# Altium PCB H_bridge_2_layers.PcbDoc
Units mil, origin at the board's own origin, x right, y up, seen from the top; angles counter-clockwise.
Board outline 2913.39 x 2362.2 mil, 2 copper layers (Top Layer, Bottom Layer); 43 components, 19 nets, 107 pads, 13 vias.
Unrouted connection lines stored in the file: 1.
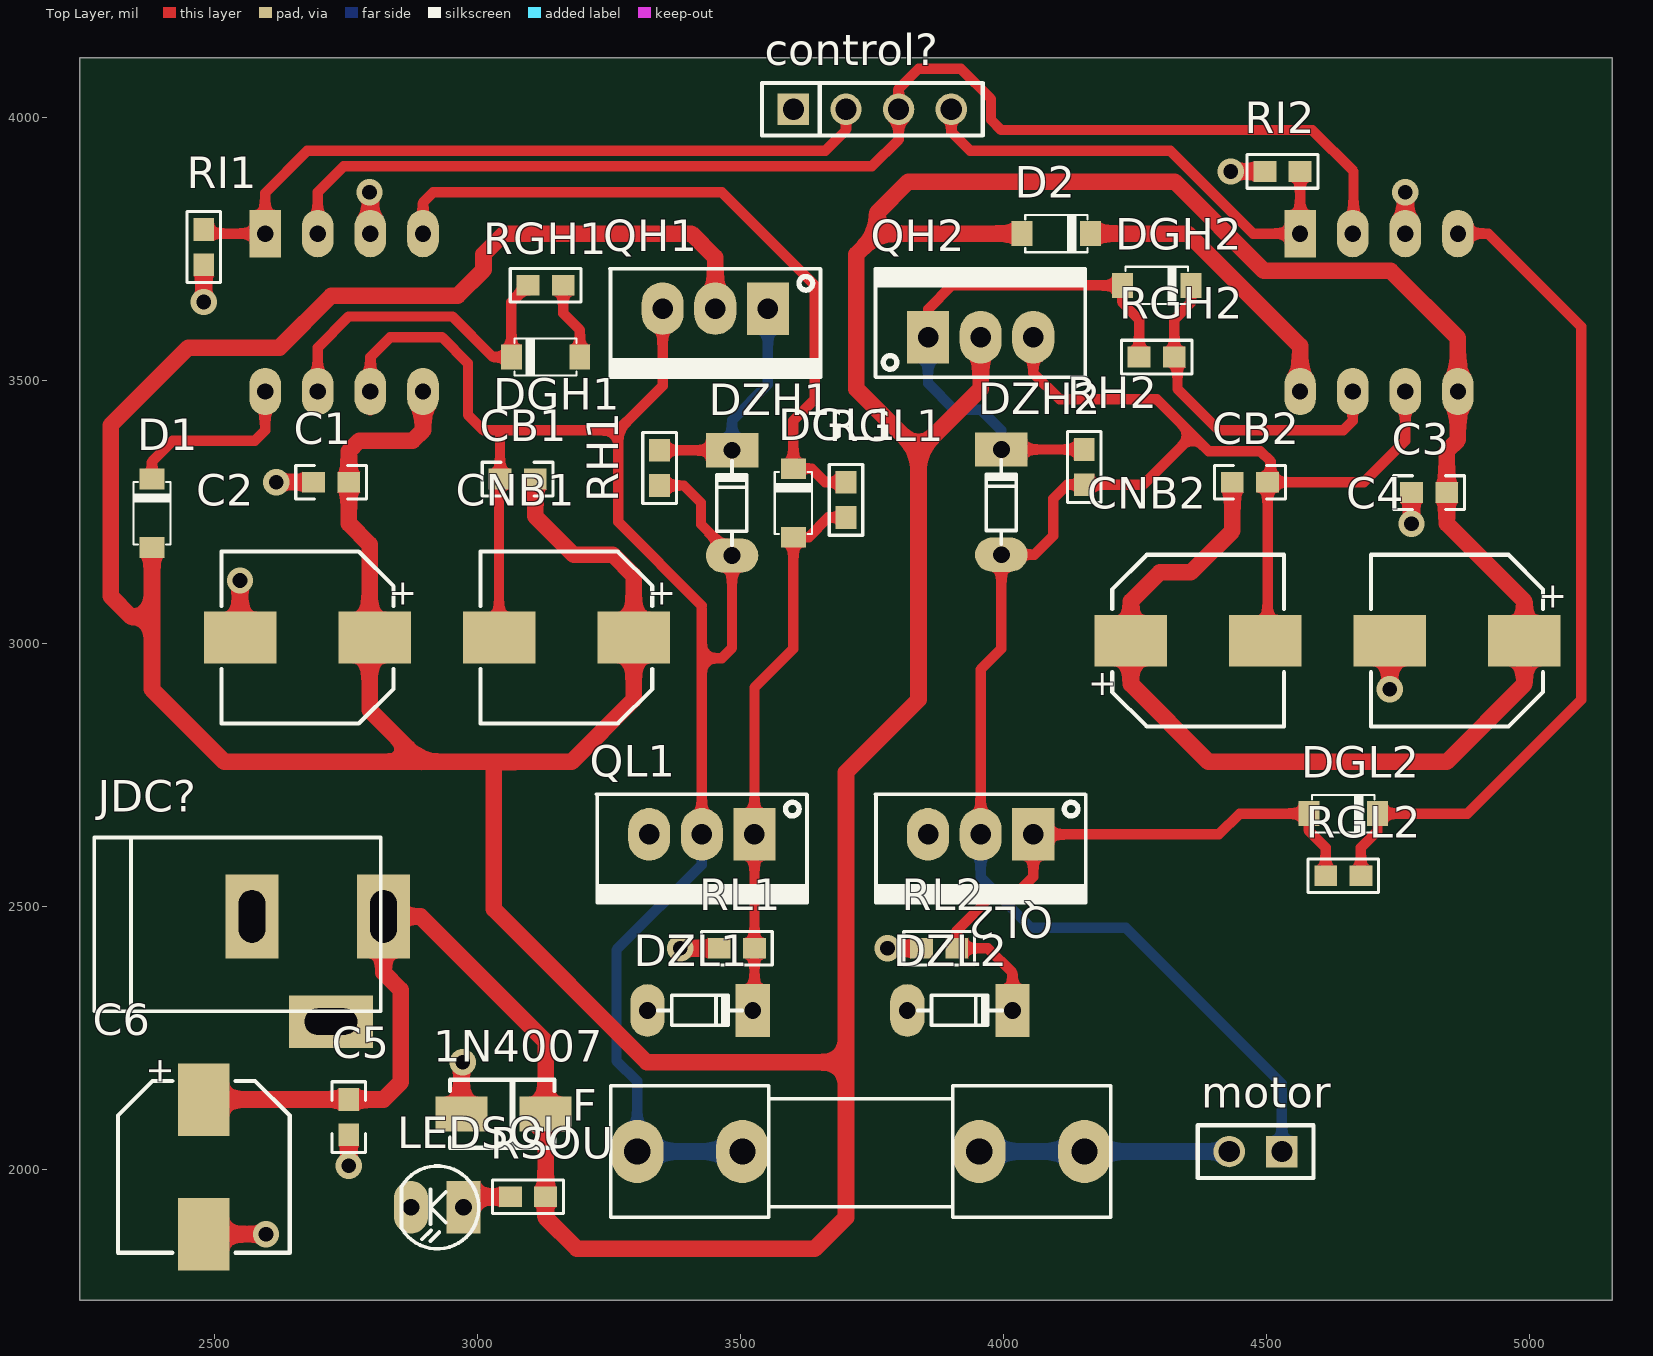
[diagram p0: Top Layer view]
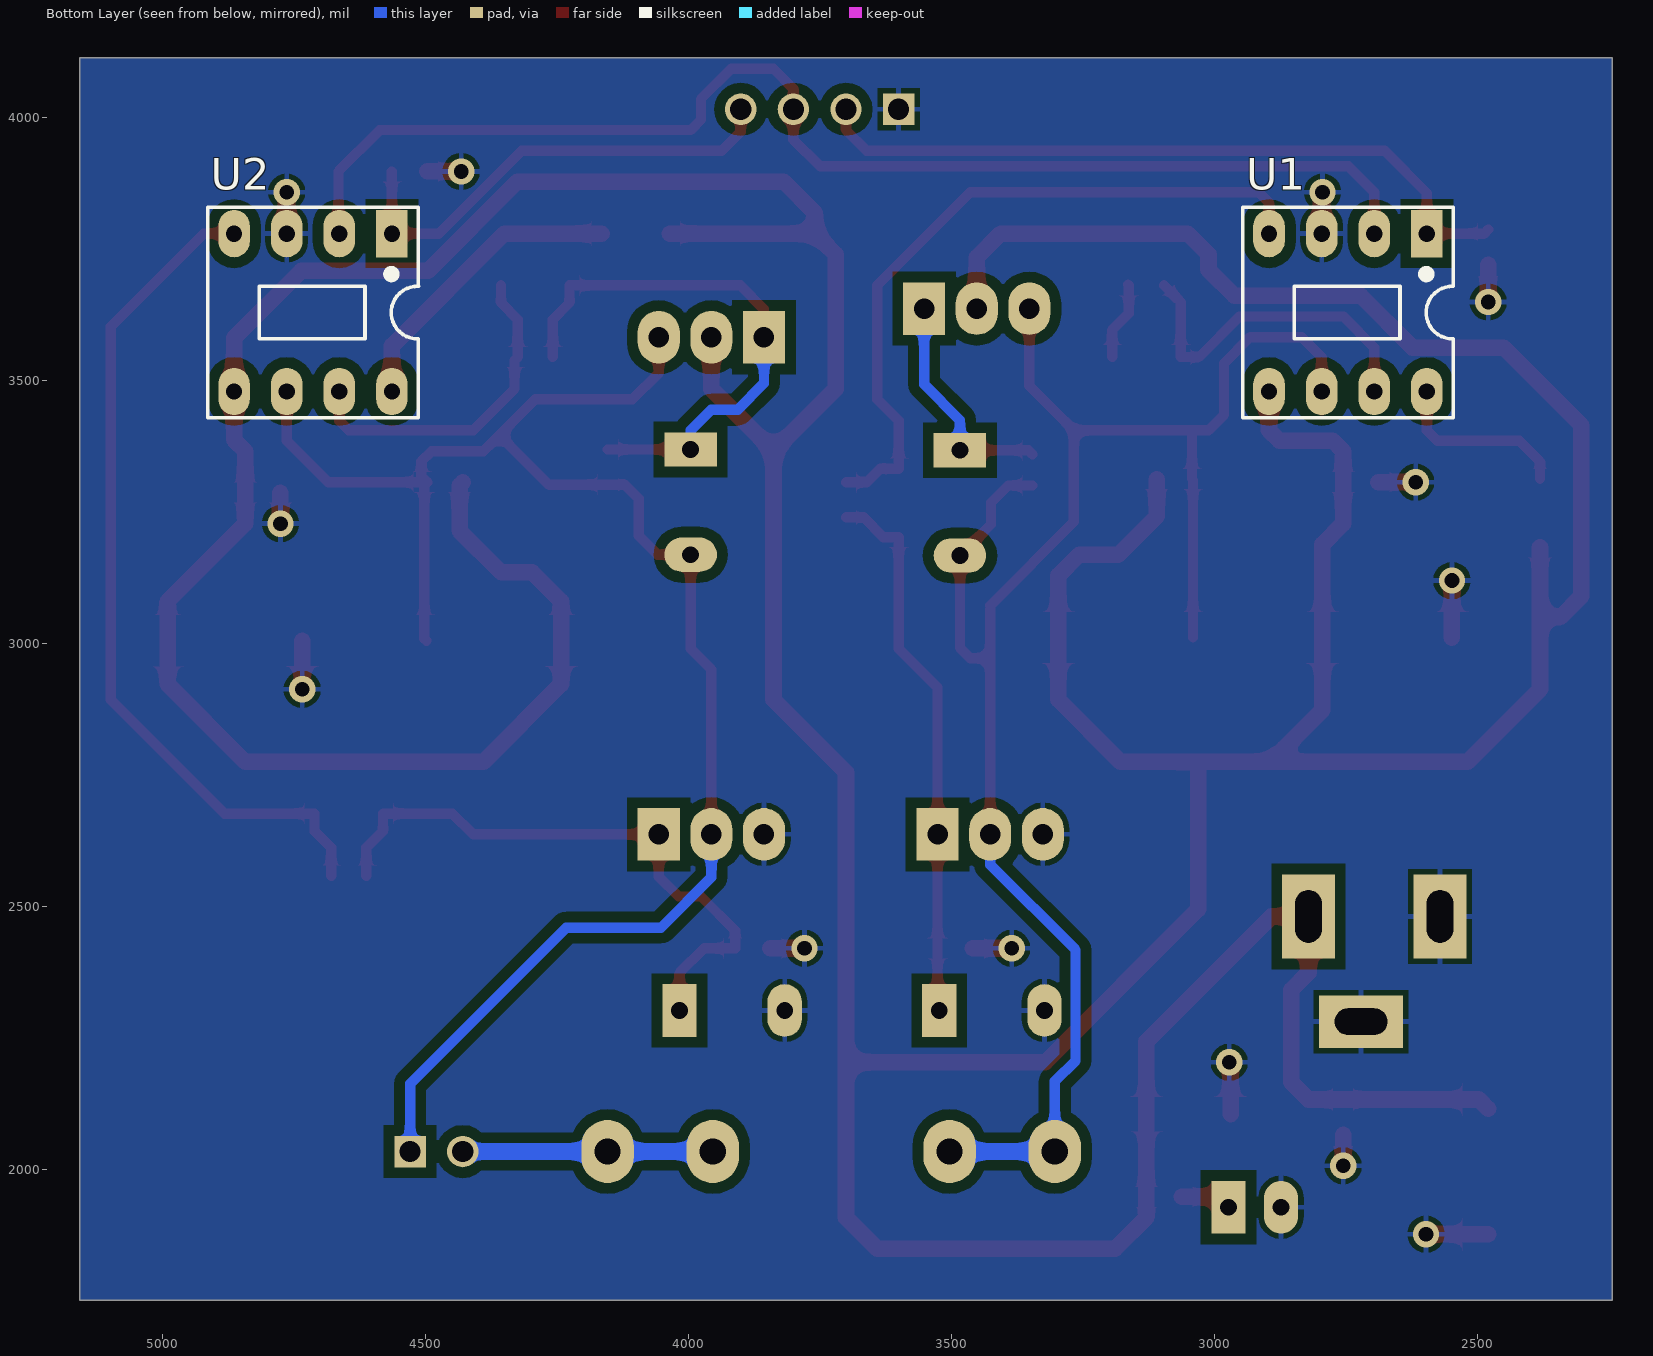
[diagram p1: Bottom Layer view, seen from below]
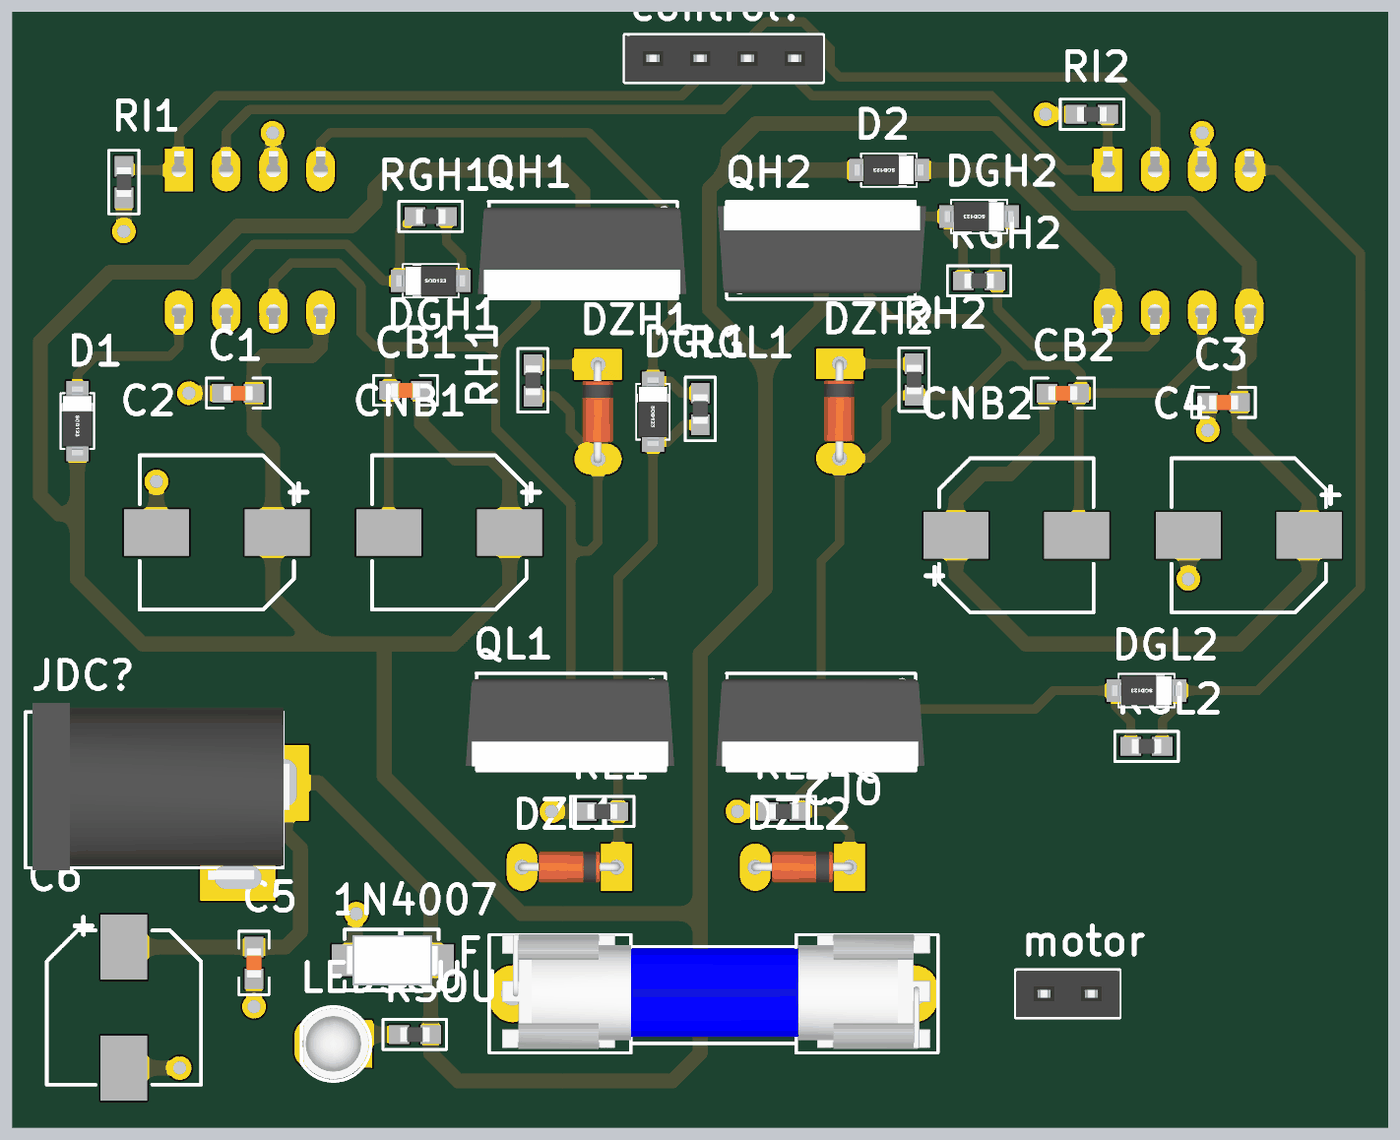
[diagram p2: 3D render of the assembled board from above, using the file's embedded part models]

## Layer stack, top to bottom
Top Solder: solder mask 0.4, Solder Resist, Dk 3.5
Top Layer: signal copper 1.4
Dielectric 1: dielectric 12.6, FR-4, Dk 4.8
Bottom Layer: signal copper 1.4
Bottom Solder: solder mask 0.4, Solder Resist, Dk 3.5

## Board outline
2244.09,4114.17 5157.48,4114.17 5157.48,1751.97 2244.09,1751.97

## Design rules (kind name [scope] priority, off if disabled: settings)
Clearance Clearance_2 [InNamedPolygon('Bottom Layer-No Net')] p1: gap=10 ignorepadtopadclearanceinfootprint=FALSE except(0: Arc-Hole Track-Hole SMDPad-Hole THPad-Hole Via-Hole Fill-Hole Poly-Hole Region-Hole Text-Hole; 20: Arc-Fill Arc-Poly Arc-Region Track-Fill Track-Poly Track-Region THPad-Fill THPad-Poly THPad-Region)
Clearance Clearance_1 [InNamedPolygon('Bottom Layer-No Net 1')] p2: gap=10 ignorepadtopadclearanceinfootprint=FALSE except(0: Arc-Hole Track-Hole SMDPad-Hole THPad-Hole Via-Hole Fill-Hole Poly-Hole Region-Hole Text-Hole; 20: Arc-Fill Arc-Poly Arc-Region Track-Fill Track-Poly Track-Region THPad-Fill THPad-Poly THPad-Region)
Clearance [All] p3: gap=10 ignorepadtopadclearanceinfootprint=FALSE except(0: Arc-Hole Track-Hole SMDPad-Hole THPad-Hole Via-Hole Fill-Hole Poly-Hole Region-Hole Text-Hole; 20: Arc-Fill Arc-Poly Arc-Region Track-Fill Track-Poly Track-Region THPad-Fill THPad-Poly THPad-Region)
PolygonConnect PolygonConnect_2 [All vs IsNamedPolygon('Bottom Layer-No Net')] p1: connectstyle=Relief reliefconductorwidth=10 reliefentries=4 polygonreliefangle="90 Angle" airgapwidth=10
PolygonConnect PolygonConnect_1 [All vs IsNamedPolygon('Bottom Layer-No Net 1')] p2: connectstyle=Relief reliefconductorwidth=11.81 reliefentries=4 polygonreliefangle="90 Angle" airgapwidth=11.81
PolygonConnect [All] p3: connectstyle=Relief reliefconductorwidth=10 reliefentries=4 polygonreliefangle="90 Angle" airgapwidth=10
RoutingVias [All] p1: holewidth=28 width=50 viastyle="Through Hole" minholewidth=28 minwidth=50 maxholewidth=28 maxwidth=50
SolderMaskExpansion [All] p1: expansion=4
Width [All] p1: maxlimit=43.31 minlimit=19.68 preferedwidth=31.5
30 further rules are at their usual default settings.

## Classes and differential pairs
component class H_bridge: 1N4007 C5 C6 DGH1 DGH2 DGL1 DGL2 DZH1 DZH2 DZL1 DZL2 JDC? LEDSOU motor QH1 QH2 QL1 QL2 RGH1 RGH2 RGL1 RGL2 RH1 RH2 RL1 RL2 RSOU
component class driver: C1 C2 C3 C4 CB1 CB2 CNB1 CNB2 control? D1 D2 RI1 RI2 U1 U2

## Components (designator, comment, footprint, x,y, rotation, side; value= is the part's Value field where it differs from the comment)
1N4007 "DSOU" DIODE_DO214AC_SMA 3049.91,2106.3 r0 top value=1000V/1A
C1 "104" "CAPC-0603 (1608)" 2722.44,3307.09 r0 top value=330p/50V
C2 "10uF" CAP_ALUM_SMT_NICHICON_H8xH10 2677.17,3011.81 r180 top value=100uF/50V
C3 "104" "CAPC-0603 (1608)" 4809.06,3287.4 r0 top value=330p/50V
C4 "10uF" CAP_ALUM_SMT_NICHICON_H8xH10 4862.2,3005.83 r180 top value=100uF/50V
C5 "104" "CAPC-0603 (1608)" 2755.91,2100.39 r90 top value=330p/50V
C6 "10uF" CAP_ALUM_SMT_NICHICON_H8xH10 2480.32,2005.91 r270 top value=100uF/50V
CB1 "104" "CAPC-0603 (1608)" 3076.77,3313.07 r0 top value=330p/50V
CB2 "104" "CAPC-0603 (1608)" 4468.5,3307.09 r180 top value=330p/50V
CNB1 "10uF" CAP_ALUM_SMT_NICHICON_H8xH10 3169.29,3011.81 r180 top value=100uF/50V
CNB2 "10uF" CAP_ALUM_SMT_NICHICON_H8xH10 4370.08,3005.83 r0 top value=100uF/50V
control? "JP4" JP4-C1T 3600.79,4015.75 r0 top
D1 "1N4148" SOD-123 2381.89,3248.03 r0 top value=100V/300MA
D2 "1N4148" SOD-123 4100.47,3779.53 r270 top value=100V/300MA
DGH1 "1N4148" SOD-123 3129.92,3544.88 r90 top value=100V/300MA
DGH2 "1N4148" SOD-123 4291.34,3681.1 r270 top value=100V/300MA
DGL1 "1N4148" SOD-123 3600.79,3267.72 r0 top value=100V/300MA
DGL2 "1N4148" SOD-123 4645.83,2677.17 r270 top value=100V/300MA
DZH1 "DIODE Zener" DIO-0.5A-SMALL 3484.25,3267.72 r270 top
DZH2 "DIODE Zener" DIO-0.5A-SMALL 3996.06,3269.29 r270 top
DZL1 "DIODE Zener" DIO-0.5A-SMALL 3423.62,2303.15 r180 top
DZL2 "DIODE Zener" DIO-0.5A-SMALL 3917.32,2303.15 r180 top
F "F1A" Fuse 3728.94,2035.04 r0 top value=Fuse
JDC? "Jac DC" DC-IN 2696.85,2381.89 r0 top
LEDSOU "LED" LED-3 2974.02,1929.13 r180 top value="LED 3 ly Single Colour"
motor "JP2" JP2-C1T 4529.13,2035.04 r180 top
QH1 "IRF840" QTO-220 3552.36,3637.01 r180 top
QH2 "IRF840" QTO-220 3856.69,3582.68 r0 top
QL1 "IRF840" QTO-220 3526.77,2637.8 r180 top
QL2 "IRF840" QTO-220 4056.69,2637.8 r180 top
RGH1 "1k" "RESC-0603 (1608)" 3129.92,3681.1 r180 top value=NF
RGH2 "1k" "RESC-0603 (1608)" 4291.34,3544.88 r180 top value=NF
RGL1 "1k" "RESC-0603 (1608)" 3700.79,3273.62 r90 top value=NF
RGL2 "1k" "RESC-0603 (1608)" 4645.83,2559.06 r180 top value=NF
RH1 "4.7k" "RESC-0603 (1608)" 3346.46,3334.25 r90 top value=NF
RH2 "4.7k" "RESC-0603 (1608)" 4153.54,3335.83 r90 top value=NF
RI1 "1k" "RESC-0603 (1608)" 2480.32,3753.94 r90 top value=NF
RI2 "1k" "RESC-0603 (1608)" 4530.31,3897.64 r0 top value=NF
RL1 "4.7k" "RESC-0603 (1608)" 3493.31,2421.26 r0 top value=NF
RL2 "4.7k" "RESC-0603 (1608)" 3877.95,2421.26 r0 top value=NF
RSOU "1k" "RESC-0603 (1608)" 3096.46,1948.82 r0 top value=NF
U1 "IR2184" DIP8/W0.3 2596.85,3779.53 r0 bottom
U2 "IR2184" DIP8/W0.3 4563.78,3779.53 r0 bottom

## Footprints (in the part's own frame and the unit in brackets; to place one, negate y for a bottom-side part, rotate by r counter-clockwise, add the part's x,y. Pads: shape width x height; smd on the part's side, far side on the other; paste and mask are expansions set on the pad)
CAP_ALUM_SMT_NICHICON_H8xH10 [mm]
  rect 3.5x2.5 smd: 1(-3.25,0) 2(3.25,0)
  silkscreen extent -4.15,-4.15 4.15,4.15, body extent -4.15,-4.15 4.15,4.15, height 10.3
"CAPC-0603 (1608)" [mm] "Resistor, Chip; 1.60 mm L X 0.80 mm W X 0.50 mm H body"
  rect 1.1x1 smd mask+0.1: 1(-0.85,0) 2(0.85,0)
  silkscreen extent -1.71,-0.81 1.71,0.81, body extent -0.8,-0.4 0.8,0.4, height 0.6
DC-IN [mil] "Jac DC input"
  rect 100x160 hole 50 slot 100 at 90 deg: 1(125,100) 2(-125,100)
  rect 160x100 hole 50 slot 100 at 0 deg: 3(25,-100)
  silkscreen extent -425,-80 120,250, body extent -410,-105 134,269, height 434
DIO-0.5A-SMALL [mil] "Diode muoi, W 80mil, L 300mil"
  oval 65x100 hole 32: 1(100,0)
  rect 65x100 hole 32: 2(-100,0)
  silkscreen extent -80,-30 80,28, body extent -108,-33 108,32, height 61
DIODE_DO214AC_SMA [mm] "Diode 2214AC- SMA type"
  rect 2.5x1.7 smd: 1(-2.032,0) 2(2.032,0)
  silkscreen extent -2.59,-1.63 2.46,1.7, body extent -2.53,-1.35 2.47,1.35, height 2.25
DIP8/W0.3 [mil] "8 PIN, W 300mil, Pin to pin 100mil"
  rect 60x90 hole 31: 1(0,0)
  oval 60x90 hole 31: 2(100,0) 3(200,0) 4(300,0) 5(300,300) 6(200,300) 7(100,300) 8(0,300)
  silkscreen extent -50,-50 350,350, body extent -50,-40 350,336, height 201
Fuse [mil] "De Fuse"
  oval 100x120 hole 50: 1(-425,0) 1(-225,0) 2(225,0) 2(425,0)
  silkscreen extent -475,-125 475,125, body extent -448,-117 459,127, height 378
JP2-C1T [mm] "2 row, straight, gold plating"
  rect 1.52x1.52 hole 1.02: 1(0,0)
  round 1.52 hole 1.02: 2(2.54,0)
  silkscreen extent -1.52,-1.27 4.06,1.27, body extent -1.52,-1.25 4.06,1.25, height 8.51
JP4-C1T [mm] "4 row, straight, gold plating"
  rect 1.52x1.52 hole 1.02: 1(0,0)
  round 1.52 hole 1.02: 2(2.54,0) 3(5.08,0) 4(7.62,0)
  silkscreen extent -1.52,-1.27 9.14,1.27, body extent -1.52,-1.25 9.14,1.25, height 8.51
LED-3 [mil] "LED 2 PIN, 3ly Only colour"
  rect 65x100 hole 32: 1(0,0)
  oval 65x100 hole 32: 2(100,0)
  silkscreen extent -29,-78 118,79, body extent -25,-75 113,75, height 217
QTO-220 [mil] "TO-220 - 1-2-3"
  rect 80x100 hole 39: 1(0,0)
  oval 80x100 hole 39: 2(100,0) 3(200,0)
  silkscreen extent -100,-76 300,130, body extent -119,-64 322,121, height 755
"RESC-0603 (1608)" [mm] "Resistor, Chip; 1.60 mm L X 0.80 mm W X 0.50 mm H body"
  rect 1.1x1 smd mask+0.1: 1(-0.85,0) 2(0.85,0)
  silkscreen extent -1.71,-0.81 1.71,0.81, body extent -0.8,-0.4 0.8,0.4, height 0.5
SOD-123 [mm] "SOD123, 2-Leads, Body 2.6x1.6mm, Pitch 3.05mm, IPC High Density"
  rect 1.2x1 smd: 1(0,-1.652) 2(0,1.652)
  silkscreen extent -0.9,-1.5 0.9,1.5, body extent -0.8,-1.85 0.8,1.85, height 1.27

## Part data
1N4007: library part 1N4007_SMA, "DIODE GEN PURP 1KV 1A SMA", MPN=MRA4007T3G, Solder=SMT
C1 C3 C5 CB1 CB2: library part 0603N331J500CT, "CAP CER 330PF 50V C0G/NP0 0603", MFR="Walsin Technology Corporation", Category=CAPACITOR, MPN=0603N331J500CT, PinCount=2, Solder=SMT
C2 C4 C6 CNB1 CNB2: library part UWT1H101MNL1GS, "CAP ALUM 100UF 20% 50V SMD", Category=CAPACITOR, MPN=UWT1H101MNL1GS, PinCount=2, Solder=SMT
control?: "WR-PHD 2.54 mm Angled Socket Header", Manufacturer="Würth Elektronik eiSos GmbH", partNo=613004143121, ComponentLink1 Description=Manufacturer, ComponentLink1URL=http://www.we-online.com, ComponentLink2 Description=Datasheet, ComponentLink2URL=http://katalog.we-online.de/em/datasheet/6130xx143121.pdf, Created by="Karrer Zheng", Created Date="29 March 2013", NoPins=04
D1 D2 DGH1 DGH2 DGL1 DGL2: library part 1N4148-W-7, "DIODE GEN PURP 100V 300MA SOD123", MFR="Diodes Incorporated", MPN=1N4148W-7-F, Solder=SMT
DZH1 DZH2 DZL1 DZL2: "Zenner"
F: library part Fuse, "Fuse", Designed by=VanDungEvn
JDC?: library part DCIN, "Jac DC input"
LEDSOU: "LED Single colour Green and Red"
motor: "WR-PHD 2.54 mm Angled Socket Header", Manufacturer="Würth Elektronik eiSos GmbH", partNo=613002143121, ComponentLink1 Description=Manufacturer, ComponentLink1URL=http://www.we-online.com, ComponentLink2 Description=Datasheet, ComponentLink2URL=http://katalog.we-online.de/em/datasheet/6130xx143121.pdf, Created by="Karrer Zheng", Created Date="29 March 2013", NoPins=02
QH1 QH2 QL1 QL2: "MOSFET N - CHANNEL 500V - 0.75 - 8A - TO-220"
RGH1 RGH2 RGL1 RGL2 RH1 RH2 RI1 RI2 RL1 RL2 RSOU: library part "RESC NF 0603", "RES SMD, Not Fill, 0603", Category=RESISTOR, Solder="Not Fill"
U1 U2: "Half-Bridge Driver"

## Via types
v1: diameter 50, hole 28, Top Layer to Bottom Layer, 13 vias

## Nets (pads, with @x,y where several pads share a name; then routed paths per layer and width w, separated by ;. In a path a pad name is that pad's centre, name@x,y a point inside that pad or via, vN(x,y) a via of type N, cw(c..) or ccw(c..) an arc to the next point about the centre after c; other vN are vias at no path point)
12V: 1N4007.2 C1.2 C2.1 C3.2 C4.1 C5.2 C6.1 CB1.2 CB2.2 CNB1.1 CNB2.1 D1.1 D2.1 JDC?.1 QH1.2 QH2.2 RSOU.2 U1.5 U2.5 | length 13643.6
  Top Layer w31.5: D1.1 2381.89,3051.18 ; C6.1@2480.32,2116.14 2498.03,2133.86 C5.2 2821.85,2133.86 2854.33,2166.34 2854.33,2342.52 2821.85,2375 JDC?.1 2892.13,2481.89 3129.92,2244.09 1N4007.2 RSOU.2 3129.92,1909.45 3188.98,1850.39 3641.73,1850.39 3700.79,1909.45 3700.79,2204.72 ; U1.5 2896.85,3405.51 2877.17,3385.83 2775.59,3385.83 2755.91,3366.14 C1.2 2755.91,3228.35 2795.28,3188.98 2795.28,2874.02 2893.7,2775.59 ; CB1.2 3110.24,3242.13 3183.07,3169.29 3257.87,3169.29 3297.24,3129.92 CNB1.1 3297.24,2893.7 3179.13,2775.59 3036.42,2775.59 ; QH1.2 3452.36,3734.25 3407.09,3779.53 3051.18,3779.53 3011.81,3740.16 3011.81,3710.63 2962.6,3661.42 2722.52,3661.42 2624.09,3562.99 2450.79,3562.99 2303.15,3415.35 2303.15,3090.55 2342.52,3051.18 2381.89,3051.18 ; QH2.2 3956.69,3484.25 3838.58,3366.14 ; D2.1 3759.84,3779.53 ; CB2.2@4429.13,3307.09 4435.04,3301.18 4435.04,3214.57 4356.38,3135.91 4297.32,3135.91 4242.13,3080.71 CNB2.1 4242.13,2923.23 4389.76,2775.59 4842.52,2775.59 4990.16,2923.23 C4.1 4990.16,3080.71 4842.52,3228.35 C3.2 4842.52,3366.14 4863.78,3387.4 U2.5 4863.78,3581.1 4736.1,3708.78 4494.9,3708.78 4325.73,3877.95 3818.9,3877.95 3759.84,3818.9 3759.84,3779.53 ; 2381.89,3051.18 2381.89,2913.39 2519.68,2775.59 2893.7,2775.59 ; 2893.7,2775.59 3036.42,2775.59 ; 3036.42,2775.59 3031.5,2770.67 3031.5,2495.4 3322.17,2204.72 3700.79,2204.72 ; 3700.79,2204.72 3700.79,2755.91 3838.58,2893.7 3838.58,3366.14 ; 3759.84,3779.53 3720.47,3740.16 3720.47,3484.25 3838.58,3366.14
GND: 1N4007.1 C1.1 C2.2 C3.1 C4.2 C5.1 C6.2 control?.1 DZL1.1 DZL2.1 JDC?.2 JDC?.3 LEDSOU.2 QL1.3 QL2.3 RI1.1 RI2.1 RL1.1 RL2.1 U1.3 U2.3 | length 1004.2
  Top Layer w31.5: C6.2 v1(2598.43,1877.95) ; v1(2480.32,3649.53) RI1.1 ; C2.2 v1(2549.21,3120.08) ; v1@2624.09,3307.09 C1.1 ; v1(2755.91,2007.87) C5.1 ; U1.3 v1@2796.85,3856.69 ; 1N4007.1 v1@2969.89,2200.6 ; v1(3385.83,2421.26) RL1.1 ; v1(3779.53,2421.26) RL2.1 ; v1(4432.09,3897.64) RI2.1 ; v1@4734.25,2925.08 C4.2 ; U2.3 v1@4763.78,3855.32 ; v1@4775.59,3236.22 C3.1
  other v1: 2972.44,2204.72 4734.25,2913.39 4775.59,3228.35 2618.11,3307.09 2795.28,3858.27 4763.78,3858.27
NetCB1_1: CB1.1 CNB1.2 DZH1.1 F.1 QH1.3 QL1.2 RH1.1 U1.6 | length 3551.5
  Top Layer w19.68: U1.6@2796.85,3443.31 U1.6 2796.85,3544.88 2834.65,3582.68 2933.07,3582.68 2982.28,3533.46 2982.28,3435.04 3011.81,3405.51 3041.34,3405.51 ; CNB1.2 3041.34,3311.1 CB1.1 3043.31,3403.54 3041.34,3405.51 ; RH1.1 3392.13,3300.79 3425.2,3267.72 3425.2,3226.77 DZH1.1 3484.25,3011.81 3484.25,2992.13 3464.57,2972.44 3426.77,2972.44 ; QH1.3 3352.36,3490.16 3267.72,3405.51 ; QL1.2 3426.77,2972.44 ; 3426.77,3064.96 3426.77,2972.44 ; 3426.77,3072.44 3267.72,3231.5 3267.72,3405.51 ; 3041.34,3405.51 3267.72,3405.51
  Bottom Layer w19.68: F.1@3303.94,2035.04 3303.94,2168.5 3264.57,2207.87 3264.57,2418.11 3426.77,2580.32 QL1.2
  Bottom Layer w31.5: F.1@3303.94,2035.04 F.1@3503.94,2035.04
NetCB2_1: CB2.1 CNB2.2 DZH2.1 motor.1 QH2.3 QL2.2 RH2.1 U2.6 | length 3327.7
  Top Layer w19.68: QL2.2 3956.69,2951.18 3996.06,2990.55 DZH2.1 4058.27,3169.29 4094.49,3205.51 4094.49,3275.28 4121.57,3302.36 RH2.1 4265.35,3302.36 4359.45,3396.46 ; QH2.3 4056.69,3514.49 4106.61,3464.57 4291.34,3464.57 4359.45,3396.46 ; CNB2.2 4502.05,3009.84 CB2.1 ; CB2.1@4501.97,3313.07 CB2.1@4502.05,3313.07 ; U2.6 4763.78,3385.83 4685.04,3307.09 CB2.1 ; 4359.45,3396.46 4389.76,3366.14 4488.19,3366.14 4507.87,3346.46 4507.87,3318.9 CB2.1@4502.05,3313.07 ; CB2.1 CB2.1@4502.05,3313.07 ; CB2.1 CB2.1 4496.06,3307.09 CB2.1@4502.05,3313.07
  Bottom Layer w19.68: QL2.2 3956.69,2556.3 4052.36,2460.63 4232.28,2460.63 4529.13,2163.78 motor.1
Netcontrol?_3: control?.3 U1.2 U2.2 | length 2423.9
  Top Layer w19.68: U1.2 2696.85,3858.27 2745.91,3907.32 3749.84,3907.32 3800.79,3958.27 control?.3 3800.79,4055.12 3838.58,4092.91 3918.9,4092.91 3976.38,4035.43 3976.38,3996.06 3996.06,3976.38 4586.61,3976.38 4665.35,3897.64 4665.35,3781.1 U2.2
NetD1_2: D1.2 U1.8 | length 346.8
  Top Layer w19.68: D1.2 2381.89,3346.46 2421.26,3385.83 2577.17,3385.83 2596.85,3405.51 U1.8
NetD2_2: D2.2 U2.8 | length 573.3
  Top Layer w31.5: D2.2 4350.39,3779.53 4563.78,3566.14 U2.8
NetDGH1_1: DGH1.1 DZH1.2 QH1.1 RGH1.1 RH1.2 | length 589.9
  Top Layer w19.68: RGH1.1@3164.96,3682.68 RGH1.1 3163.39,3627.95 3194.96,3596.38 DGH1.1 ; RH1.2@3346.46,3360.24 3353.94,3367.72 DZH1.2
  Bottom Layer w19.68: DZH1.2 3484.25,3425.2 3552.36,3493.31 QH1.1
NetDGH1_2: DGH1.2 RGH1.2 U1.7 | length 657.2
  Top Layer w19.68: U1.7 2696.85,3562.99 2755.91,3622.05 2952.76,3622.05 3029.92,3544.88 DGH1.2 3064.88,3649.53 RGH1.2
NetDGH2_1: DGH2.1 DZH2.2 QH2.1 RGH2.2 RH2.2 | length 1048.6
  Top Layer w19.68: QH2.1 3856.69,3635.75 3902.05,3681.1 DGH2.1 4226.3,3647.72 4257.87,3616.14 RGH2.2 ; DZH2.2 RH2.2
  Bottom Layer w19.68: QH2.1 3856.69,3494.88 3906.69,3444.88 3956.69,3444.88 3996.06,3405.51 DZH2.2
NetDGH2_2: DGH2.2 RGH2.1 U2.7 | length 641.5
  Top Layer w19.68: DGH2.2 4356.38,3647.72 4324.8,3616.14 RGH2.1 4330.71,3538.98 4330.71,3484.25 4409.45,3405.51 4645.67,3405.51 4663.78,3423.62 U2.7
NetDGL1_1: DGL1.1 DZL1.2 QL1.1 RGL1.1 RL1.2 | length 1047
  Top Layer w19.68: DZL1.2 3526.77,2306.3 RL1.2 QL1.1 3526.77,2916.54 3600.79,2990.55 DGL1.1 3629.84,3202.68 3667.32,3240.16 RGL1.1
NetDGL1_2: DGL1.2 RGL1.2 U1.4 | length 1361.4
  Top Layer w19.68: U1.4 2896.85,3838.58 2916.54,3858.27 3464.57,3858.27 3641.73,3681.1 3641.73,3464.57 3600.79,3423.62 DGL1.2 3635.75,3332.76 3661.42,3307.09 RGL1.2
NetDGL2_1: DGL2.1 DZL2.2 QL2.1 RGL2.2 RL2.2 | length 1169.8
  Top Layer w19.68: DZL2.2 4017.32,2374.41 3970.47,2421.26 RL2.2 3911.42,2454.72 3976.38,2519.68 4018.9,2519.68 4056.69,2557.48 QL2.1 4409.45,2637.8 4448.82,2677.17 DGL2.1 4580.79,2643.62 4612.36,2612.05 RGL2.2
NetDGL2_2: DGL2.2 RGL2.1 U2.4 | length 1625.1
  Top Layer w19.68: RGL2.1 4679.29,2612.36 4710.87,2643.94 DGL2.2 4881.89,2677.17 5098.43,2893.7 5098.43,3602.36 4921.26,3779.53 U2.4
NetF_2: F.2 motor.2 | length 475.2
  Bottom Layer w31.5: F.2@3953.94,2035.04 4153.94,2035.04 motor.2
NetLEDSOU_1: LEDSOU.1 RSOU.1 | length 97.1
  Top Layer w31.5: LEDSOU.1 2993.7,1948.82 RSOU.1
PWM1: control?.2 RI1.2 U1.1 | length 1389.8
  Top Layer w19.68: RI1.2 2488.19,3779.53 U1.1 2596.85,3856.69 2677.17,3937.01 3661.42,3937.01 3700.79,3976.38 control?.2
PWM2: control?.4 RI2.2 U2.1 | length 903.9
  Top Layer w19.68: control?.4 3900.79,3973.23 3937.01,3937.01 4317.01,3937.01 4435.08,3818.94 4474.49,3779.53 U2.1 RI2.2

## Polygon pours and split planes (outlines as drawn)
GND on Bottom Layer "Bottom Layer-No Net" (solid, pour order 6): 2244.09,4114.17 5157.48,4114.17 5157.48,1751.97 2244.09,1751.97

## Text inside footprints (layer, text, board x,y; h text height)
C2: Mechanical 15 "+" at 2886.17,3115.81 h47.24 r180; Top Overlay "+" at 2886.17,3115.81 h47.24 r180
C4: Mechanical 15 "+" at 5071.2,3109.83 h47.24 r180; Top Overlay "+" at 5071.2,3109.83 h47.24 r180
C6: Mechanical 15 "+" at 2376.32,2214.91 h47.24 r270; Top Overlay "+" at 2376.32,2214.91 h47.24 r270
CNB1: Mechanical 15 "+" at 3378.29,3115.81 h47.24 r180; Top Overlay "+" at 3378.29,3115.81 h47.24 r180
CNB2: Mechanical 15 "+" at 4161.08,2901.83 h47.24; Top Overlay "+" at 4161.08,2901.83 h47.24